# Altium PCB ITEMS PCB Rev A.PcbDoc (part 2 of 2)
Units mm, origin at the board's own origin, x right, y up, seen from the top; angles counter-clockwise.
Board outline 90 x 90 mm, 4 copper layers (Top Layer 1, Inner 1, Ground, Bottom Layer 1), stack 0.567 mm thick; 78 components, 58 nets, 244 pads, 50 vias.
Unrouted connection lines stored in the file: 137.
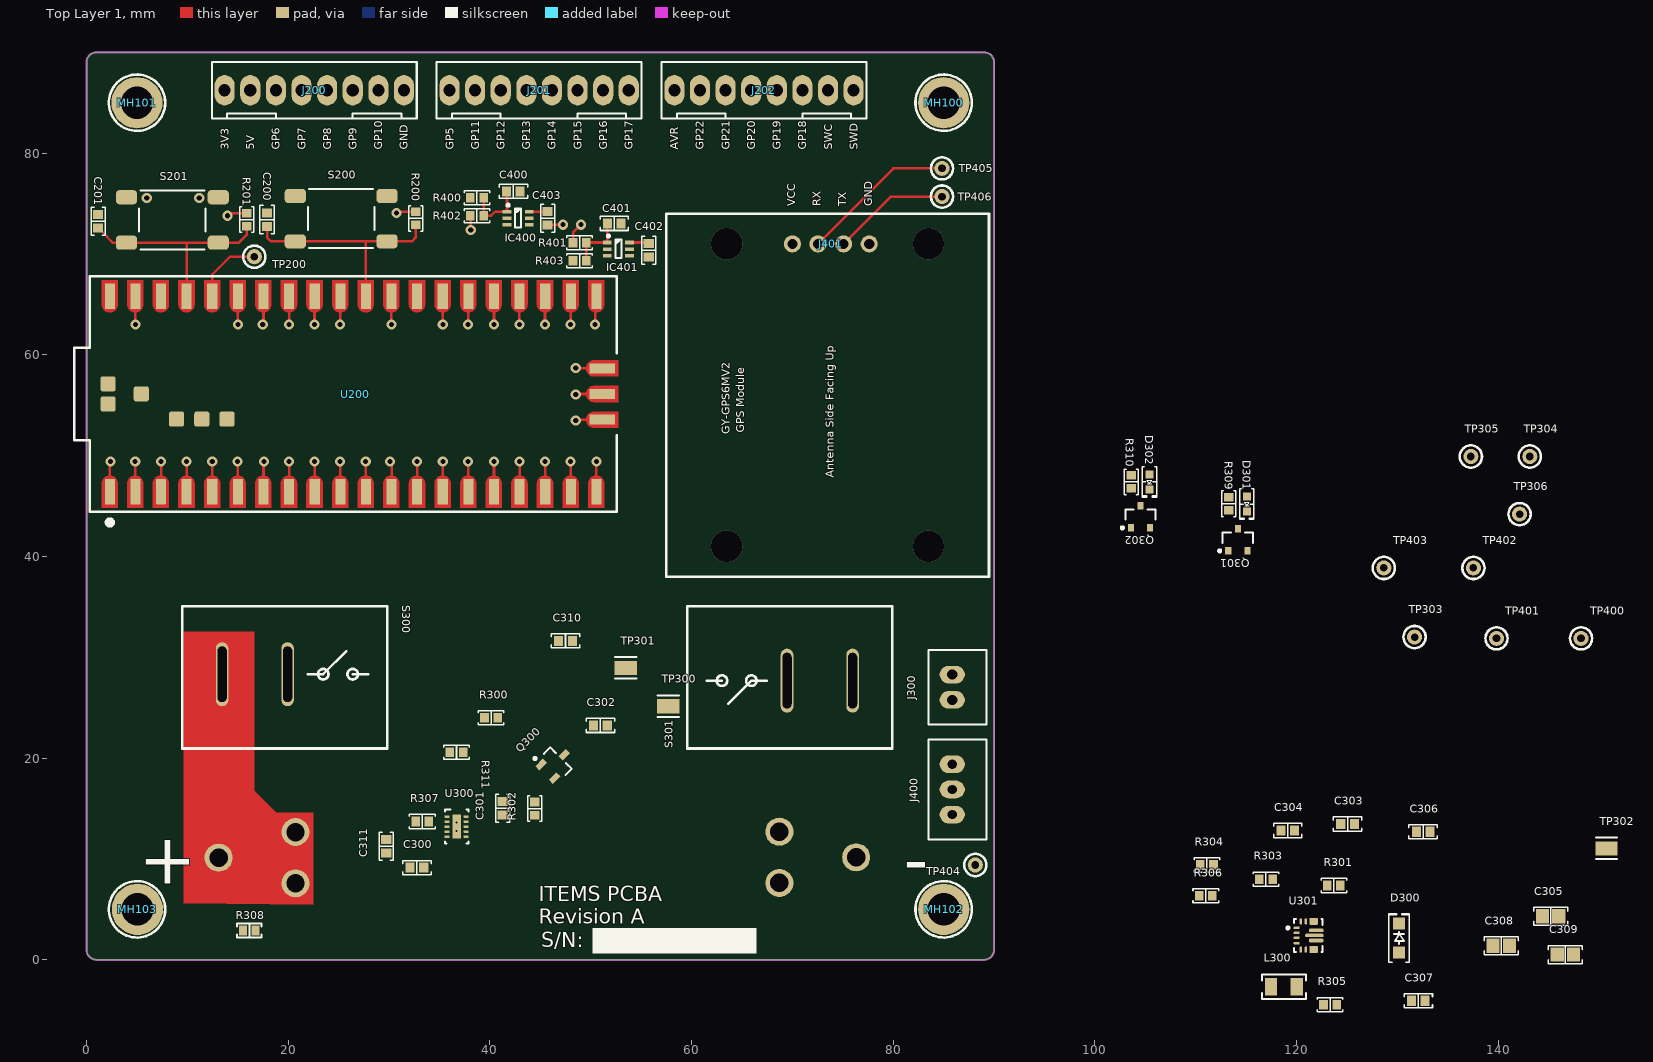
[diagram p0: Top Layer 1 view]

## Via types
v1: diameter 1, hole 0.5, Top Layer 1 to Bottom Layer 1, tented both sides, 44 vias
v2: diameter 3.1, hole 3.1, Top Layer 1 to Bottom Layer 1, tented both sides, 4 vias
v3: diameter 0.5, hole 0.2, Top Layer 1 to Bottom Layer 1, 2 vias

## Nets (pads, with @x,y where several pads share a name; then routed paths per layer and width w, separated by ;. In a path a pad name is that pad's centre, name@x,y a point inside that pad or via, vN(x,y) a via of type N, cw(c..) or ccw(c..) an arc to the next point about the centre after c; other vN are vias at no path point)
5V_ON: Q302.1 R305.1 U301.2
+3V3: C311.2 J200.1 R200.2 TP306.1 U300.4 | length 2
  Top Layer 1 w0.254: v1(30.741,74.048) 30.876,74.183 R200.2
+3V3_PICO: TP200.1 U200.36 | length 7.1
  Top Layer 1 w0.254: U200.36 12.467,67.966 14.224,69.723 TP200.1
+5V: C402.2 C403.2 IC400.6 IC401.6 J200.2 J400.1 J401.1 R201.2 R301.2 R309.2 R310.2 U200.39 | length 8.7
  Top Layer 1 w0.254: v1@4.826,63.344 v1@4.847,63.365 ; v1@4.847,62.886 U200.39 ; v1(13.97,73.787) 14.239,74.056 R201.2 ; IC400.6 45.695,74.183 C403.2 ; IC401.6 55.651,71.135 C402.2
  other v1: 4.847,62.992
+5V5: C305.2 C307.2 C308.2 C309.2 D300.1 R304.2 R305.2 TP302.1 U301.7-8
AVREF: J202.1 U200.35 | length 2.9
  Top Layer 1 w0.254: v1@14.986,63.344 v1@15.007,63.365 ; v1@15.007,62.886 U200.35
  other v1: 15.007,62.992
C\H\G\: Q301.1 R302.1 TP303.1 U200.6 U300.8 | length 2.6
  Top Layer 1 w0.254: v1@14.986,49.022 15.007,49.001 U200.6
  other v1: 14.986,49.403
CTRL: TP304.1 U200.5 U300.7 | length 2.9
  Top Layer 1 w0.254: v1@12.446,49.276 12.467,49.255 U200.5
  other v1: 12.467,49.403
GND: BT300.2 C200.1 C201.1 C300.1 C301.1 C302.1 C303.1 C304.1 C305.1 C306.1 C307.1 C308.1 C309.1 C310.1 C311.1 C400.1 C401.1 C402.1 C403.1 IC400.2 IC400.5 IC401.2 IC401.5 J200.8 J300.2 J400.2 J401.4 MH100.0 MH101.0 MH102.0 MH103.0 Q301.2 Q302.2 R306.1 R307.1 R308.1 R402.1 R403.1 S200.1 S200.2 S201.1 S201.2 U200.3 U200.8 U200.13 U200.18 U200.23 U200.28 U200.33 U200.38 U200.42 U300.3 U300.11 U301.4 U301.6 U301.10 U301.15 | length 23
  Top Layer 1 w0.254: S201.1 S201.1@3.986,75.592 ; v1@5.942,75.592 v1(5.969,75.565) ; v1@7.366,49.149 7.387,49.128 U200.3 ; v1(11.176,75.565) v1@11.203,75.592 ; S201.2@13.032,75.592 S201.2 ; v1@20.066,49.149 20.087,49.128 U200.8 ; v1@20.087,62.971 U200.33 ; v1@20.087,63.365 v1@20.193,63.259 ; v1(32.766,49.403) 32.787,49.382 U200.13 ; R402.1 38.1,73.757 v1(38.1,72.39) ; v1(45.466,49.403) 45.487,49.382 U200.18 ; v1(45.466,62.992) 45.466,65.777 U200.23 ; C403.1 45.76,72.898 v1(47.244,72.898) ; v1@48.514,56.134 48.54,56.108 U200.42
  other v1: 7.377,49.403 20.066,49.403 48.514,56.07 20.087,62.992
  other v3: 36.703,12.792 36.703,13.624
GP5: J201.1 U200.7 | length 2.6
  Top Layer 1 w0.254: U200.7 17.547,48.916 v1@17.653,49.022
  other v1: 17.6,49.403
GP6: J200.3 U200.9 | length 2.7
  Top Layer 1 w0.254: v1@22.606,49.149 22.627,49.128 U200.9
  other v1: 22.606,49.403
GP7: J200.4 U200.10 | length 2.9
  Top Layer 1 w0.254: v1@25.146,49.276 25.167,49.255 U200.10
  other v1: 25.146,49.403
GP8: J200.5 U200.11 | length 2.7
  Top Layer 1 w0.254: v1@27.686,49.149 27.707,49.128 U200.11
  other v1: 27.686,49.403
GP9: J200.6 U200.12 | length 2.9
  Top Layer 1 w0.254: v1@30.099,49.276 30.247,49.128 U200.12
  other v1: 30.099,49.403
GP10: J200.7 U200.14 | length 2.9
  Top Layer 1 w0.254: U200.14 35.327,49.17 v1@35.433,49.276
  other v1: 35.327,49.403
GP11: J201.2 U200.15 | length 2.7
  Top Layer 1 w0.254: v1@37.846,49.149 37.867,49.128 U200.15
  other v1: 37.846,49.403
GP12: J201.3 U200.16 | length 2.9
  Top Layer 1 w0.254: v1@40.386,49.276 40.407,49.255 U200.16
  other v1: 40.407,49.403
GP13: J201.4 U200.17 | length 2.9
  Top Layer 1 w0.254: v1@42.926,49.276 42.947,49.255 U200.17
  other v1: 42.926,49.403
GP14: J201.5 U200.19 | length 3
  Top Layer 1 w0.254: v1(48.006,49.403) 48.027,49.382 U200.19
GP15: J201.6 U200.20 | length 3
  Top Layer 1 w0.254: v1@50.546,49.403 50.567,49.382 U200.20
  other v1: 50.567,49.403
GP16: J201.7 U200.21 | length 2.9
  Top Layer 1 w0.254: v1(50.419,62.992) 50.441,63.014 50.441,65.672 U200.21
GP17: J201.8 U200.22 | length 3.2
  Top Layer 1 w0.254: v1@48.006,63.344 v1@48.027,63.365 ; v1@48.027,62.632 U200.22
  other v1: 48.006,62.992
GP18: J202.6 U200.24 | length 2.8
  Top Layer 1 w0.254: v1(42.926,62.992) 42.926,65.777 U200.24
GP19: J202.5 U200.25 | length 3.1
  Top Layer 1 w0.254: v1@40.407,62.844 U200.25 ; v1@40.407,63.365 v1@40.513,63.259
  other v1: 40.407,62.992
GP20: J202.4 U200.26 | length 2.8
  Top Layer 1 w0.254: v1(37.846,62.992) 37.846,65.777 U200.26
GP21: J202.3 U200.27 | length 2.9
  Top Layer 1 w0.254: v1@35.306,63.344 v1@35.327,63.365 ; v1@35.327,62.886 U200.27
  other v1: 35.327,62.992
GP22: J202.2 U200.29 | length 2.8
  Top Layer 1 w0.254: v1(30.226,62.992) 30.226,65.777 U200.29
HARD_RESET: C201.2 R201.1 S201.3 S201.4 U200.37 | length 21.9
  Top Layer 1 w0.254: C201.2 1.193,72.564 2.052,71.706 2.052,71.656 2.587,71.12 S201.3 9.906,71.12 ; U200.37 9.927,71.099 9.906,71.12 ; R201.1 15.875,71.882 15.113,71.12 S201.4 9.906,71.12
I_SENSE: R307.2 TP305.1 U200.34 U300.2 | length 3.1
  Top Layer 1 w0.254: v1@17.399,63.217 v1@17.547,63.365 ; v1@17.547,62.886 U200.34
  other v1: 17.473,62.992
L1: L300.2 U301.11
L2: L300.1 U301.9
NetBT300_1: BT300.1 S300.1
NetC301_2: C301.2 Q300.2 R300.1 R302.2 R311.2 U300.10
NetC302_2: C302.2 C303.2 C304.2 R300.2 R303.2 TP301.1 U301.12-13
NetC306_2: C306.2 U301.3
NetC400_2: C400.2 IC400.1 R400.1 R402.2 TP400.1 | length 6.3
  Top Layer 1 w0.254: R400.1 R402.2 40.132,73.787 40.528,74.183 IC400.1 41.699,76.157 C400.2
NetC401_2: C401.2 IC401.1 R401.1 R403.2 TP401.1 | length 5.8
  Top Layer 1 w0.254: R403.2 R401.1 49.56,71.135 IC401.1 C401.2 C401.2
NetD300_2: D300.2 R301.1
NetD301_1: D301.1 R309.1
NetD301_2: D301.2 Q301.3
NetD302_1: D302.1 R310.1
NetD302_2: D302.2 Q302.3
NetIC400_3: IC400.3 IC400.4 TP402.1 U200.31 | length 2.8
  Top Layer 1 w0.254: v1(25.146,62.992) 25.146,65.777 U200.31
NetIC401_3: IC401.3 IC401.4 TP403.1 U200.32 | length 3.1
  Top Layer 1 w0.254: v1@22.606,62.738 22.606,65.777 U200.32
  other v1: 22.606,62.992
NetJ300_1: J300.1 S301.1
NetJ400_3: J400.3 TP404.1 U200.4 | length 2.9
  Top Layer 1 w0.254: v1@9.906,49.276 9.927,49.255 U200.4
  other v1: 9.906,49.403
NetJ401_2: J401.2 TP405.1 U200.1 | length 18.3
  Top Layer 1 w0.254: U200.1 2.307,49.17 v1@2.413,49.276 ; J401.2 80.026,78.486 TP405.1
  other v1: 2.36,49.403
NetJ401_3: J401.3 TP406.1 U200.2 | length 14.6
  Top Layer 1 w0.254: v1@4.826,49.276 4.847,49.255 U200.2 ; J401.3 79.772,75.692 TP406.1
  other v1: 4.826,49.403
NetQ300_1: Q300.1 U300.9
NetR303_1: R303.1 U301.1 U301.14
NetR304_1: R304.1 R306.2 U301.5
NetR308_2: R308.2 U300.5
RESET: C200.2 R200.1 S200.3 S200.4 U200.30 | length 22.9
  Top Layer 1 w0.254: C200.2 17.899,71.65 18.302,71.247 S200.3 27.686,71.247 ; U200.30 27.707,71.226 27.686,71.247 ; R200.1 32.639,71.628 32.258,71.247 S200.4 27.686,71.247
SWCLK: J202.7 U200.41 | length 2.7
  Top Layer 1 w0.254: v1(48.514,53.467) 48.615,53.568 U200.41
SWDIO: J202.8 U200.43 | length 2.5
  Top Layer 1 w0.254: v1@48.641,58.674 48.667,58.648 U200.43
  other v1: 48.514,58.674
V_BATT: R400.2
V_SOLAR: C300.2 R311.1 R401.2 S301.2 TP300.1 U300.1 | length 2.1
  Top Layer 1 w0.254: R401.2 48.245,72.121 v1(49.022,72.898)
VBATT: C310.2 Q300.3 S300.2 U300.6
pads on no net: U200.40 U200.44 U200.45 U200.46 U200.47 U200.48 U200.49
copper on no net:
  other v2: 63.5,41 83.5,41 63.5,71 83.5,71

## Polygon pours and split planes (outlines as drawn)
GND on Ground "NONET_L-01_P-001" (solid, remove dead copper, pour order 0): 92.837,93.345 92.837,-3.429 -3.302,-3.429 -3.302,93.345

## Keep-outs
Keep-Out Layer:
  the board outline again, w0.2

## Other copper
Top Layer 1:
  region net NetBT300_1: 22.479,5.461 22.479,14.605 18.796,14.605 16.637,16.764 16.637,32.512 9.652,32.512 9.652,5.6

## Silkscreen, mask and mechanical layers (free items; w line width, h text height)
Top Overlay:
  rectangle: 50.165,0.635 66.421,3.175
  text "3V3" at 14.096,80.337 h0.8 r90
  text "5V" at 16.636,80.337 h0.8 r90
  text "GP6" at 19.176,80.337 h0.8 r90
  text "GP7" at 21.716,80.337 h0.8 r90
  text "GP8" at 24.256,80.337 h0.8 r90
  text "GP9" at 26.796,80.337 h0.8 r90
  text "GP10" at 29.336,80.337 h0.8 r90
  text "GND" at 31.876,80.337 h0.8 r90
  text "GP5" at 36.395,80.337 h0.8 r90
  text "GP11" at 38.935,80.337 h0.8 r90
  text "GP12" at 41.475,80.337 h0.8 r90
  text "GP13" at 44.015,80.337 h0.8 r90
  text "GP14" at 46.555,80.337 h0.8 r90
  text "GP15" at 49.095,80.337 h0.8 r90
  text "GP16" at 51.635,80.337 h0.8 r90
  text "GP17" at 54.175,80.337 h0.8 r90
  text "AVR" at 58.693,80.337 h0.8 r90
  text "GP22" at 61.233,80.337 h0.8 r90
  text "GP21" at 63.773,80.337 h0.8 r90
  text "GP20" at 66.313,80.337 h0.8 r90
  text "GP19" at 68.853,80.337 h0.8 r90
  text "GP18" at 71.393,80.337 h0.8 r90
  text "SWC" at 73.933,80.337 h0.8 r90
  text "SWD" at 76.473,80.337 h0.8 r90
  text "+" at 5.199,7.541 h5
  text "-" at 81.018,7.526 h5
  text "ITEMS PCBA / Revision A" at 44.831,3.556 h1.5
  text "S/N:" at 45.081,1.266 h1.5
Bottom Overlay:
  text "ECE 356 / October 6, 2022 / Miguel Manguerra / Carter Cooper" at 123.444,56.642 h1.5
  text "18650 Batteries Only!!!" at 57.658,9.398 h1.52
  text "+" at 8.517,7.541 h5
  text "-" at 84.336,7.526 h5

## Text inside footprints (layer, text, board x,y; h text height)
J401: Top Overlay "GPS Module" at 65.205,52.263 h0.8 r90; Top Overlay "RX" at 72.825,74.742 h0.8 r90; Top Overlay "TX" at 75.365,74.742 h0.8 r90; Top Overlay "GND" at 77.905,74.742 h0.8 r90; Top Overlay "VCC" at 70.285,74.742 h0.8 r90; Top Overlay "Antenna Side Facing Up" at 74.082,47.818 h0.8 r90